# EAGLE board breakout (EAGLE 7.4.0)
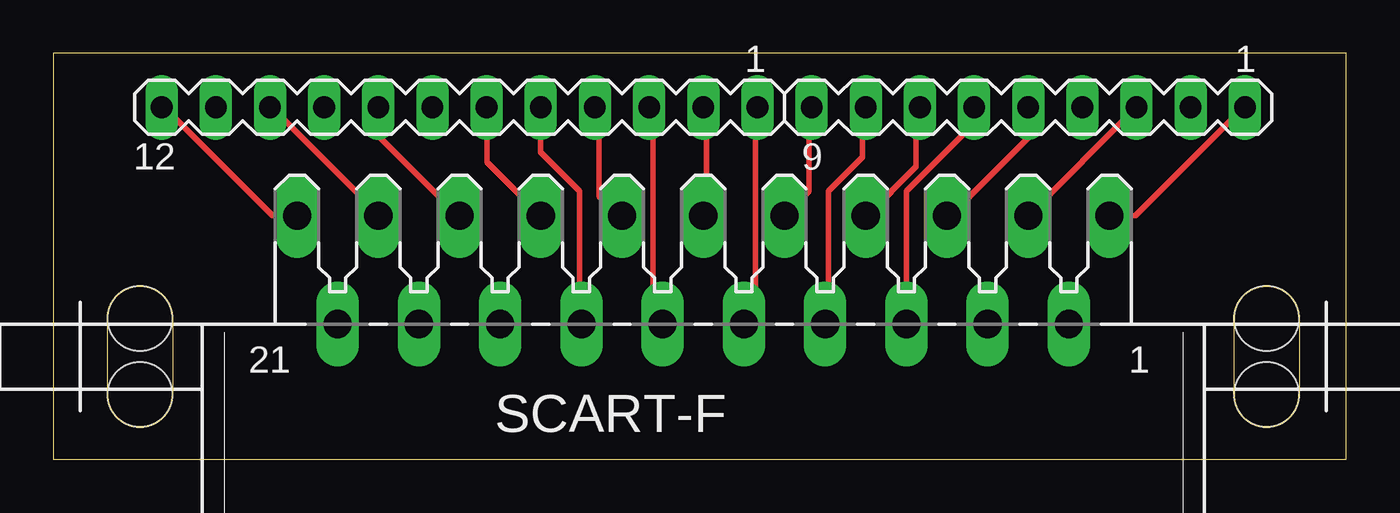
[diagram p0: board, top side]
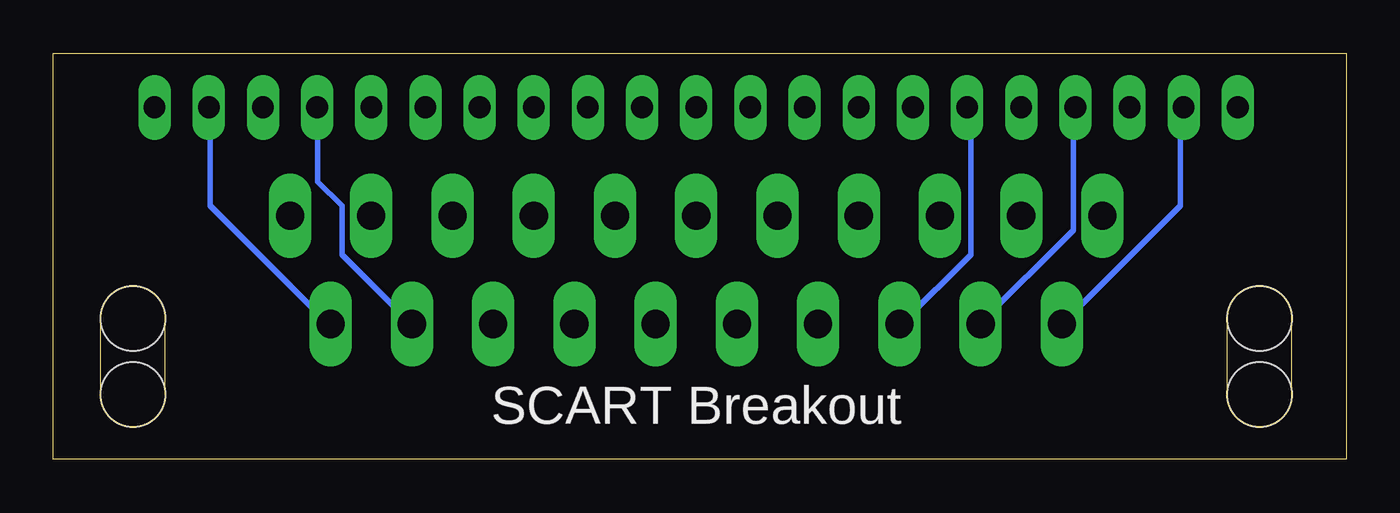
[diagram p1: board, bottom side, seen from below]

Size 60.63 x 19.04 mm. Coordinates in mm from the lower left corner, seen from the top.
Outline: 0,0 60.63,0 60.63,19.04 0,19.04 0,0
Copper layers (1*16): Top 0.035mm / dielectric 1.5mm / Bottom 0.035mm
Design rules "default": minimum track width 10mil, minimum drill 24mil, track to track 8mil, track to pad 8mil, pad to pad 8mil, via to via 8mil, smd to smd 8mil, copper to edge 40mil, drill to drill 8mil, minimum pad ring 10mil, minimum via ring 8mil, stop-mask expansion 4mil, vias tented up to drill 0mil, thermal gap 10mil

## Footprints (pad centres in the part's own frame; a part is rotated, then mirrored left to right if it is on the bottom)
MA12-1 = drill 1.016 long: 1 -13.97,0; 2 -11.43,0; 3 -8.89,0; 4 -6.35,0; 5 -3.81,0; 6 -1.27,0; 7 1.27,0; 8 3.81,0; 9 6.35,0; 10 8.89,0; 11 11.43,0; 12 13.97,0
MA09-1 = drill 1.016 long: 1 -10.16,0; 2 -7.62,0; 3 -5.08,0; 4 -2.54,0; 5 0,0; 6 2.54,0; 7 5.08,0; 8 7.62,0; 9 10.16,0
SCART-F = drill 1.321 long: 1 19.05,5.08; 2 17.145,0; 3 15.24,5.08; 4 13.335,0; 5 11.43,5.08; 6 9.525,0; 7 7.62,5.08; 8 5.715,0; 9 3.81,5.08; 10 1.905,0; 11 0,5.08; 12 -1.905,0; 13 -3.81,5.08; 14 -5.715,0; 15 -7.62,5.08; 16 -9.525,0; 17 -11.43,5.08; 18 -13.335,0; 19 -15.24,5.08; 20 -17.145,0; 21 -19.05,5.08 | hole 3.023: 26.416,0.254; 26.416,-3.302; -26.416,0.254; -26.416,-3.302

## Placement (x,y rotation side)
SV1  [MA12-1]  19.05,16.51 180 top
SV2  [MA09-1]  45.72,16.51 180 top
X1  SCART-F  [SCART-F]  30.48,6.35 0 top

## Library data of the parts
SV1 SV2 = con-lstb; OC_FARNELL: unknown; OC_NEWARK: unknown
X1 = con-hirschmann; OC_FARNELL: unknown; OC_NEWARK: unknown

## Nets
N$1: SV2.1 X1.1
N$2: SV2.2 X1.2
N$3: SV2.3 X1.3
N$4: SV2.4 X1.4
N$5: SV2.5 X1.5
N$6: SV2.6 X1.6
N$7: SV2.7 X1.7
N$8: SV2.8 X1.8
N$9: SV2.9 X1.9
N$10: SV1.1 X1.10
N$11: SV1.2 X1.11
N$12: SV1.3 X1.12
N$13: SV1.4 X1.13
N$14: SV1.5 X1.14
N$15: SV1.6 X1.15
N$16: SV1.7 X1.16
N$17: SV1.8 X1.17
N$18: SV1.9 X1.18
N$19: SV1.10 X1.19
N$20: SV1.11 X1.20
N$21: SV1.12 X1.21

## Tracks (layer width: path | path; a pad name or v marks a point on that pad's centre or on a via)
N$1
  Top 0.254: X1.1 50.75,11.43 55.78,16.46 SV2.1
N$2
  Bottom 0.254: SV2.2 53.26,16.46 53.26,11.89 47.78,6.4 X1.2
N$3
  Top 0.254: X1.3 SV2.3
N$4
  Bottom 0.254: SV2.4 48.23,16.46 48.23,13.03 47.09,11.89 47.09,9.6 43.89,6.4 X1.4
N$5
  Top 0.254: SV2.5 45.72,15.09 42.06,11.43 X1.5
N$6
  Top 0.254: X1.6 40.01,12.57 42.98,15.54 42.98,16.46 SV2.6
N$7
  Top 0.254: SV2.7 40.46,16.46 40.46,13.72 38.18,11.43 X1.7
N$8
  Top 0.254: SV2.8 37.95,16.46 37.95,14.17 36.35,12.57 36.35,6.4 X1.8
N$9
  Top 0.254: X1.9 35.43,12.57 35.43,16.46 SV2.9
N$10
  Top 0.254: SV1.1 32.92,16.46 32.92,6.86 32.46,6.4 X1.10
N$11
  Top 0.254: SV1.2 30.63,16.46 30.63,11.43 X1.11
N$12
  Top 0.254: SV1.3 28.12,16.46 28.12,6.86 28.57,6.4 X1.12
N$13
  Top 0.254: SV1.4 25.6,16.46 25.6,12.34 26.52,11.43 X1.13
N$14
  Top 0.254: SV1.5 22.86,14.4 24.69,12.57 24.69,6.4 X1.14
N$15
  Top 0.254: X1.15 20.34,13.95 20.34,16.46 SV1.6
N$16
  Bottom 0.254: SV1.7 17.6,16.46 17.6,9.6 20.8,6.4 X1.16
N$17
  Top 0.254: SV1.8 15.32,16.46 15.32,15.09 18.97,11.43 X1.17
N$18
  Bottom 0.254: SV1.9 12.8,16.46 12.8,10.74 17.14,6.4 X1.18
N$19
  Top 0.254: SV1.10 10.29,16.46 15.32,11.43 X1.19
N$20
  Bottom 0.254: SV1.11 7.77,16.46 7.77,11.89 13.26,6.4 X1.20
N$21
  Top 0.254: X1.21 10.29,11.43 5.26,16.46 SV1.12

## Text on the board
bPlace: SCART Breakout